# Altium PCB SHIELD_ENC28J60.PcbDoc
Units mil, origin at the board's own origin, x right, y up, seen from the top; angles counter-clockwise.
Board outline 2677.17 x 2086.61 mil, 2 copper layers (Top Layer, Bottom Layer); 66 components, 42 nets, 224 pads, 54 vias.
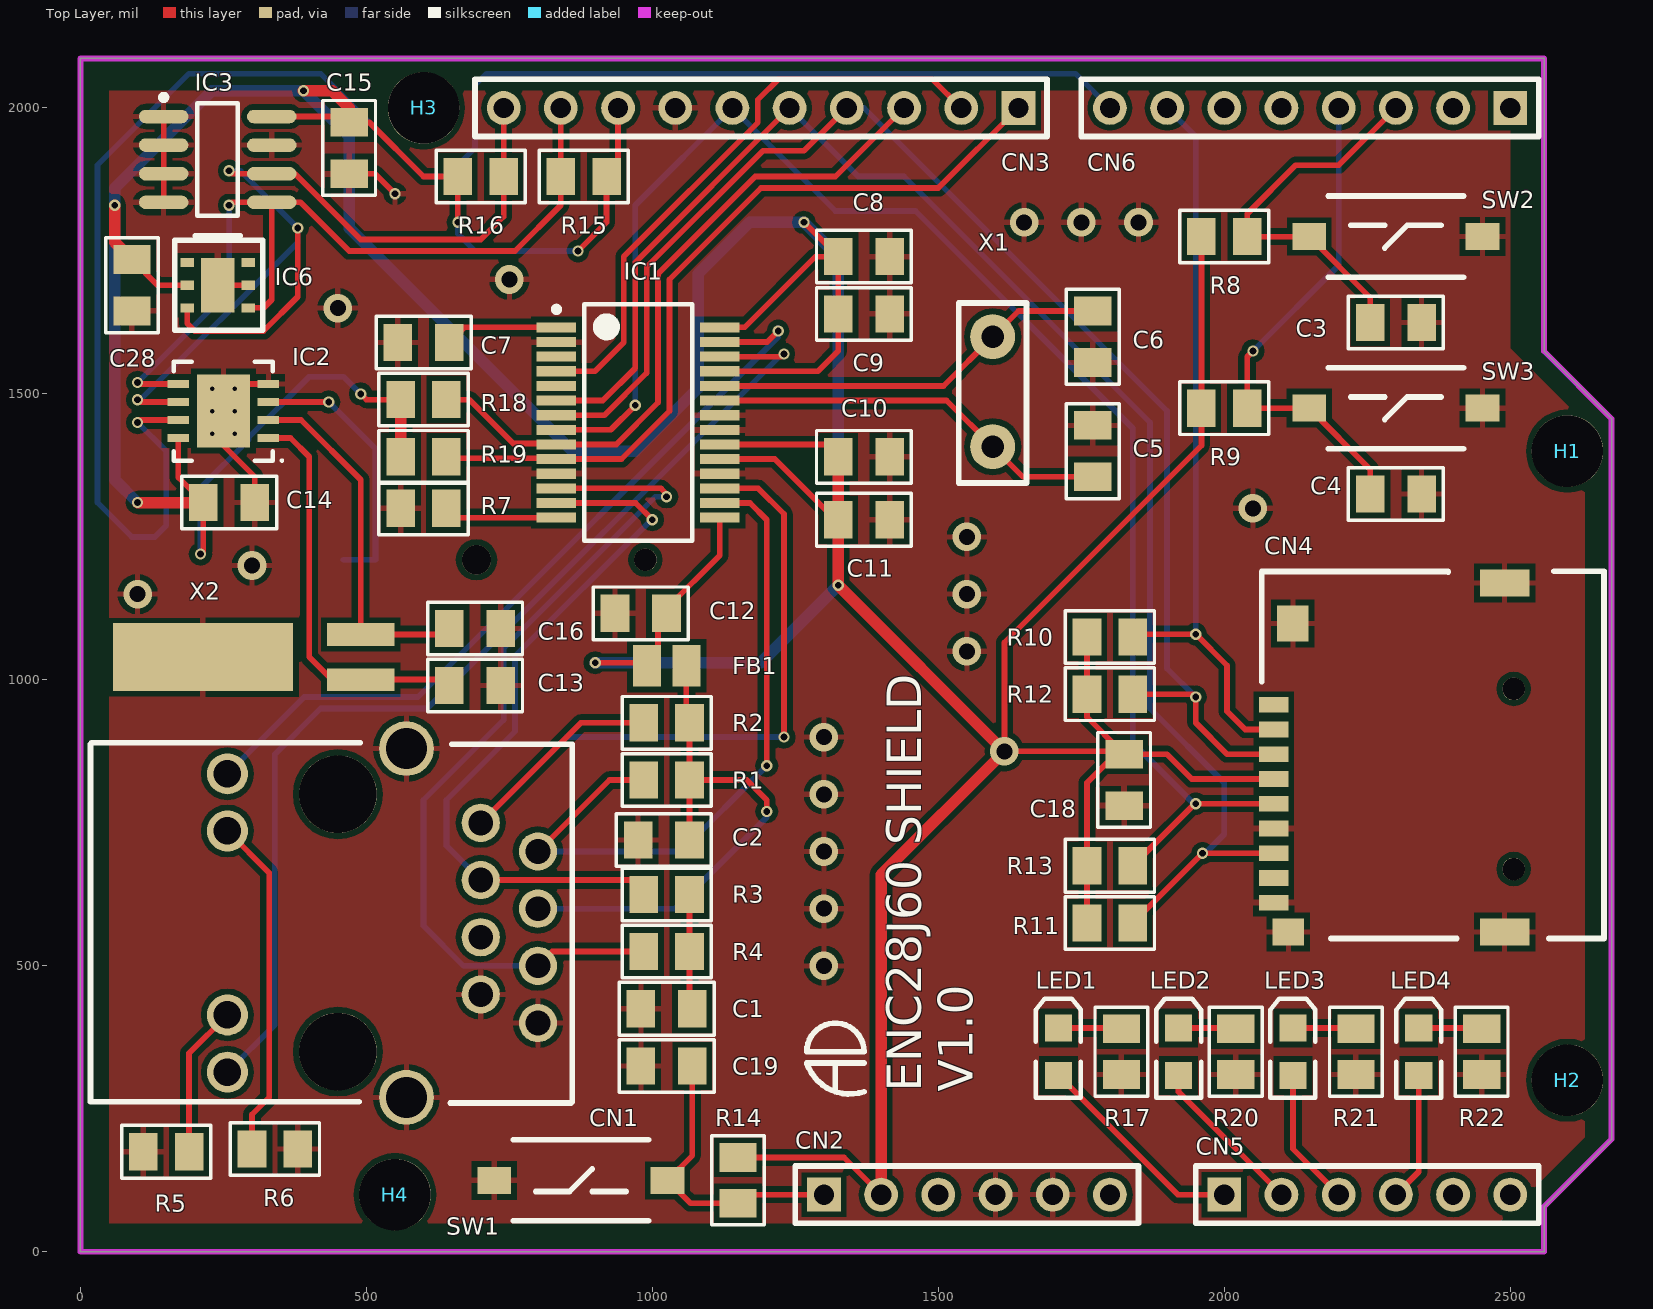
[diagram p0: Top Layer view]
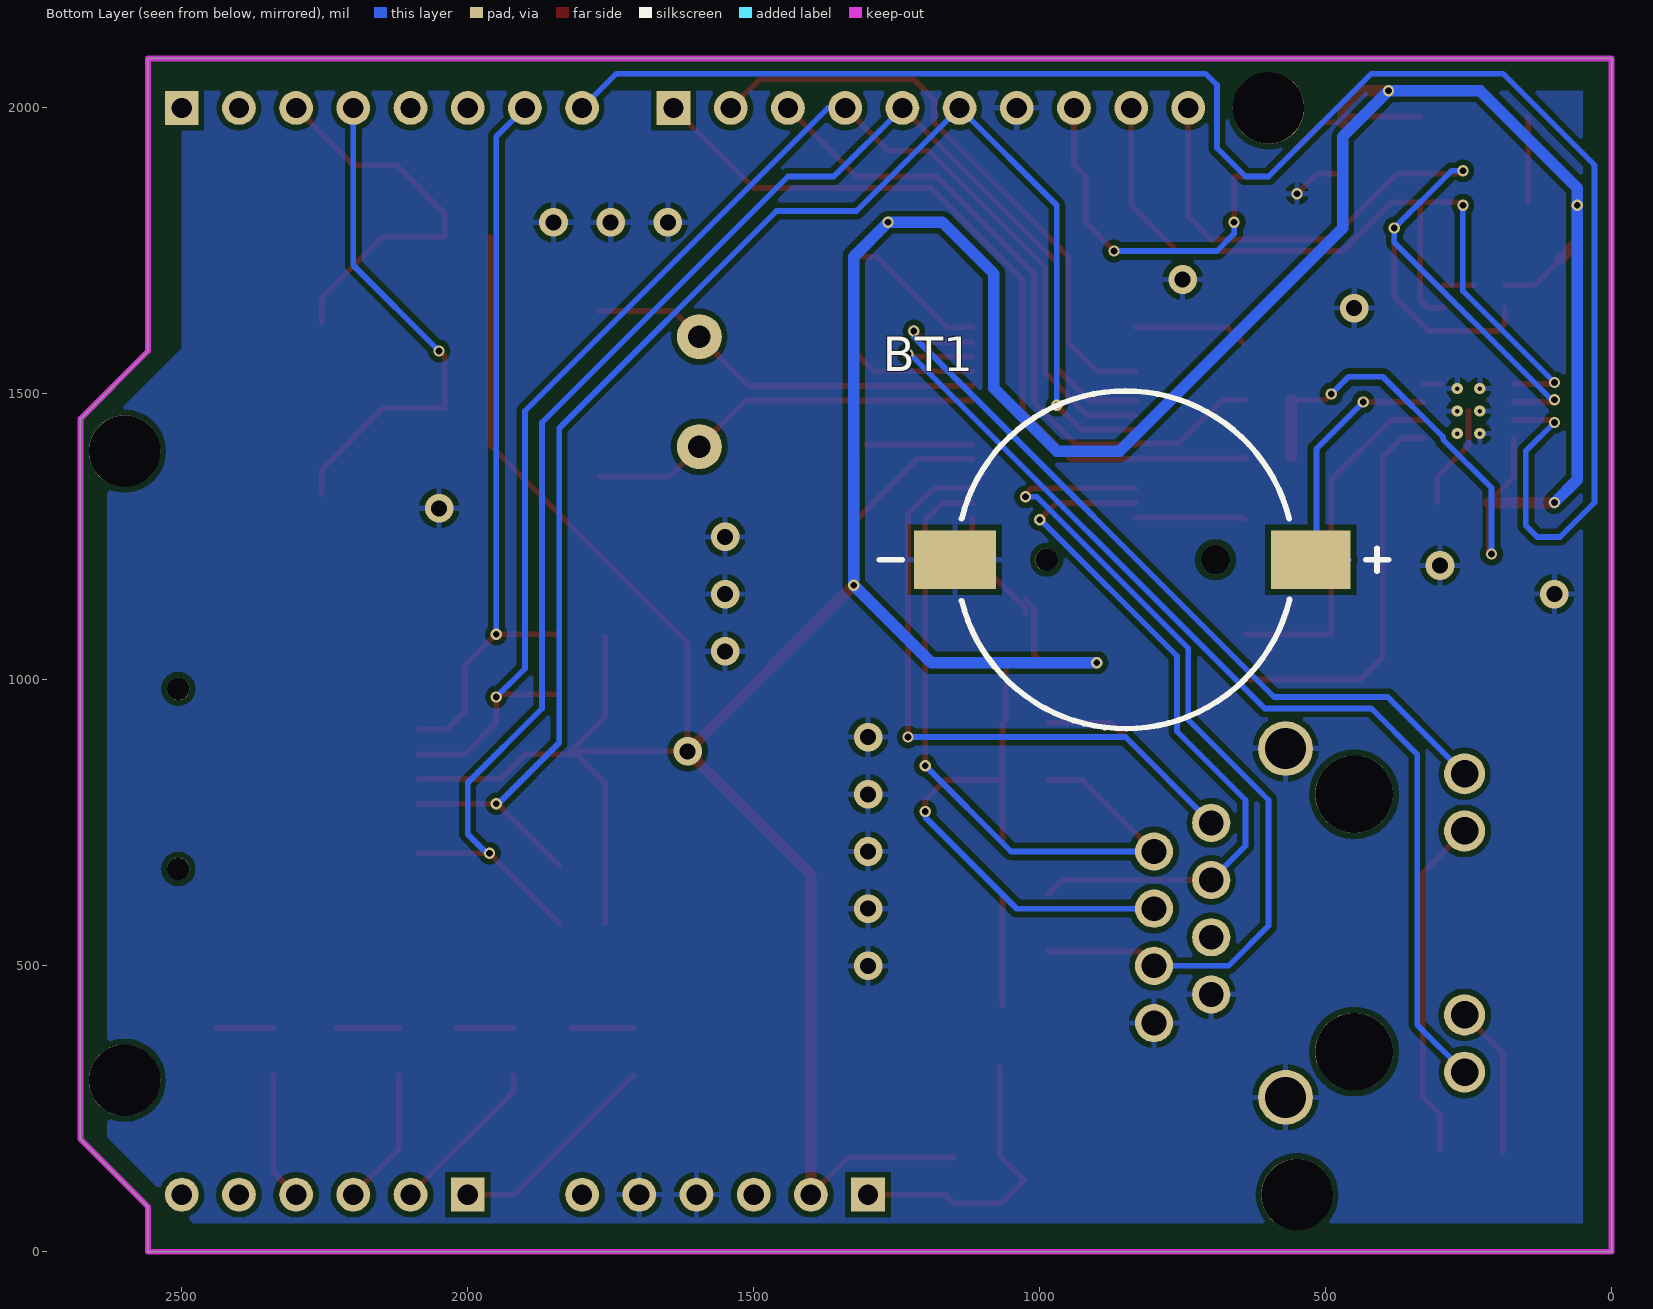
[diagram p1: Bottom Layer view, seen from below]

## Layer stack, top to bottom
Top Solder: solder mask 0.4, Solder Resist, Dk 3.5
Top Layer: signal copper 1.4
Dielectric 1: dielectric 12.6, FR-4, Dk 4.8
Bottom Layer: signal copper 1.4
Bottom Solder: solder mask 0.4, Solder Resist, Dk 3.5

## Board outline
0,0 0,2086.61 2559.06,2086.61 2559.06,1574.8 2677.17,1456.69 2677.17,196.85 2559.06,78.74 2559.06,0

## Design rules (kind name [scope] priority, off if disabled: settings)
Clearance [All] p1: gap=10
PolygonConnect [All] p1: connectstyle=Relief reliefconductorwidth=10 reliefentries=4 polygonreliefangle="90 Angle" airgapwidth=10
RoutingVias [All] p1: holewidth=11.81 width=19.68 viastyle="Through Hole" minholewidth=7.87 minwidth=15.75 maxholewidth=28 maxwidth=50
SolderMaskExpansion [All] p1: expansion=4
Width [All] p1: maxlimit=20 minlimit=10 preferedwidth=10
30 further rules are at their usual default settings.

## Components (designator, comment, footprint, x,y, rotation, side; value= is the part's Value field where it differs from the comment)
BT1 "BATTERY" MPD_BC501SM 850,1210 r180 bottom
C1 "CAP_NP" CAPC2012X100N_EIA0805 1025,425 r0 top
C2 "CAP_NP" CAPC2012X100N_EIA0805 1020,720 r0 top
C3 "CAP_NP" CAPC2012X100N_EIA0805 2300,1625 r180 top
C4 "CAP_NP" CAPC2012X100N_EIA0805 2300,1325 r180 top
C5 "CAP_NP" CAPC2012X100N_EIA0805 1770,1400 r270 top
C6 "CAP_NP" CAPC2012X100N_EIA0805 1770,1600 r90 top
C7 "CAP_NP" CAPC2012X100N_EIA0805 600,1590 r0 top
C8 "CAP_NP" CAPC2012X100N_EIA0805 1370,1740 r180 top
C9 "CAP_NP" CAPC2012X100N_EIA0805 1370,1640 r180 top
C10 "CAP_NP" CAPC2012X100N_EIA0805 1370,1390 r180 top
C11 "CAP_NP" CAPC2012X100N_EIA0805 1370,1280 r180 top
C12 "CAP_NP" CAPC2012X100N_EIA0805 979.74,1116.37 r0 top
C13 "CAP_NP" CAPC2012X100N_EIA0805 690,990 r180 top
C14 "CAP_NP" CAPC2012X100N_EIA0805 260,1310 r180 top
C15 "CAP_NP" CAPC2012X100N_EIA0805 470,1930 r90 top
C16 "CAP_NP" CAPC2012X100N_EIA0805 690,1090 r180 top
C18 "CAP_NP" CAPC2012X100N_EIA0805 1825,825 r90 top
C19 "CAP_NP" CAPC2012X100N_EIA0805 1025,325 r0 top
C28 "CAP_NP" CAPC2012X100N_EIA0805 90,1690 r90 top
CN1 "HR911105A" [HANRUN]HR911105A 450,575 r90 top
CN2 "HDR_1X6" HDRFV6W70P254_1X6_1524X254X1118P 1300,100 r0 top locked
CN3 "HDR_1X10" HDRFV10W70P254_1X10_2540X254X1118P 1640,2000 r180 top locked (schematic designator CN?)
CN4 "MICRO-SD" MICRO-SD-SELF-EJECT 2086.61,826.77 r180 top
CN5 "HDR_1X6" HDRFV6W70P254_1X6_1524X254X1118P 2000,100 r0 top locked
CN6 "HDR_1X8" HDRFV8W70P254_1X8_2032X254X1118P 2500,2000 r180 top locked
FB1 "BEAD" FILC2012X100N_EIA0805 1025,1025 r0 top
H1 "HOLES" HOLE_125MIL#1 2795.28,177.17 r0 top
H2 "HOLES" HOLE_125MIL#2 2992.13,177.17 r0 top
H3 "HOLES" HOLE_125MIL#3 3188.98,177.17 r0 top
H4 "HOLES" HOLE_125MIL#4 3346.46,177.17 r0 top
IC1 "ENC28J60T-I/SS" SOP65P780X200-28N_[MICROCHIP]SSOP28 975,1450 r0 top
IC2 "PCF8523TK/1,118" SON80P400X100_HS-9N_[NXP]SOT909-1 250,1470 r180 top
IC3 "AT24C128" SOIC127P600X175-8N 240,1910 r0 top
IC6 "SHT21" SHT21 240,1690 r0 top
LED1 "LED" LEDC2012X70N_EIA0805_RED 1710,350 r270 top
LED2 "LED" LEDC2012X70N_EIA0805_RED 1920,350 r270 top
LED3 "LED" LEDC2012X70N_EIA0805_RED 2120,350 r270 top
LED4 "LED" LEDC2012X70N_EIA0805_RED 2340,350 r270 top
R1 "RES" RESC2013X65N_EIA0805 1025,825 r180 top
R2 "RES" RESC2013X65N_EIA0805 1025,925 r180 top
R3 "RES" RESC2013X65N_EIA0805 1025,625 r0 top
R4 "RES" RESC2013X65N_EIA0805 1025,525 r0 top
R5 "RES" RESC2013X65N_EIA0805 150,175 r180 top
R6 "RES" RESC2013X65N_EIA0805 340,180 r0 top
R7 "RES" RESC2013X65N_EIA0805 600,1300 r180 top
R8 "RES" RESC2013X65N_EIA0805 2000,1775 r0 top
R9 "RES" RESC2013X65N_EIA0805 2000,1475 r0 top
R10 "RES" RESC2013X65N_EIA0805 1800,1075 r0 top
R11 "RES" RESC2013X65N_EIA0805 1800,575 r0 top
R12 "RES" RESC2013X65N_EIA0805 1800,975 r0 top
R13 "RES" RESC2013X65N_EIA0805 1800,675 r0 top
R14 "RES" RESC2013X65N_EIA0805 1150,125 r270 top
R15 "RES" RESC2013X65N_EIA0805 880,1880 r180 top (schematic designator R9)
R16 "RES" RESC2013X65N_EIA0805 700,1880 r0 top (schematic designator R10)
R17 "RES" RESC2013X65N_EIA0805 1820,350 r270 top
R18 "RES" RESC2013X65N_EIA0805 600,1490 r0 top
R19 "RES" RESC2013X65N_EIA0805 600,1390 r0 top
R20 "RES" RESC2013X65N_EIA0805 2020,350 r90 top
R21 "RES" RESC2013X65N_EIA0805 2230,350 r90 top
R22 "RES" RESC2013X65N_EIA0805 2450,350 r90 top
SW1 "SWITCH_TACTILE_2PIN" C&K_RS-282G05A3-SM_RT 875,125 r0 top
SW2 "SWITCH_TACTILE_2PIN" C&K_RS-282G05A3-SM_RT 2300,1775 r180 top
SW3 "SWITCH_TACTILE_2PIN" C&K_RS-282G05A3-SM_RT 2300,1475 r180 top
X1 "CRYSTAL" HC-49/US 1595,1600 r270 top
X2 "CRYSTAL_32K" 32.768_DIP 490,1040 r90 top

## Footprints (in the part's own frame and the unit in brackets; to place one, negate y for a bottom-side part, rotate by r counter-clockwise, add the part's x,y. Pads: shape width x height; smd on the part's side, far side on the other; paste and mask are expansions set on the pad)
32.768_DIP [mm]
  rect 1x3 smd: 1(-1,0) 2(1,0)
  rect 3x8 smd: 3(0,7)
  body extent -1.5,-0.01 1.5,11.01, height 3
[HANRUN]HR911105A [mm]
  round 1.7 hole 1.1: 1(4.445,-6.35) 2(3.175,-8.89) 3(1.905,-6.35) 4(0.635,-8.89) 5(-0.635,-6.35) 6(-1.905,-8.89) 7(-3.175,-6.35) 8(-4.445,-8.89)
  round 1.82 hole 1.22: 9(6.625,4.9) 10(4.085,4.9) 11(-4.085,4.9) 12(-6.625,4.9)
  round 2.43 hole 1.83: 13(7.745,-3.05) 14(-7.745,-3.05)
  round 3.45 hole 3.45: ""(-5.715,0) ""(5.715,0)
  silkscreen extent -8,-10.41 8,10.99, body extent -7.94,-10.41 7.94,10.99, height 13.51
C&K_RS-282G05A3-SM_RT [mm]
  rect 1.5x1.2 smd: 1(-3.85,0) 2(3.85,0)
  silkscreen extent -3,-1.8 3,1.8, body extent -4,-1.75 4,1.75, height 5
CAPC2012X100N_EIA0805 [mil]
  rect 50x65 smd: 1(-45,0) 2(45,0)
  silkscreen extent -83,-46 83,46, body extent -39,-25 39,25, height 31
FILC2012X100N_EIA0805 [mm] "Chip Inductor, 2-Leads, Body 2.0x1.3mm, IPC Medium Density"
  rect 1.25x1.85 smd: 1(-0.875,0) 2(0.875,0)
  body extent -1,-0.62 1,0.63, height 0.85
HC-49/US [mm]
  round 2 hole 1: 1(0,0) 2(4.88,0)
  silkscreen extent -1.5,-1.5 6.5,1.5, body extent -2.99,-2.24 7.99,2.25, height 3.6
HDRFV6W70P254_1X6_1524X254X1118P [mm]
  rect 1.5x1.5 hole 0.9: 1(0,0)
  round 1.5 hole 0.9: 2(2.54,0) 3(5.08,0) 4(7.62,0) 5(10.16,0) 6(12.7,0)
  silkscreen extent -1.27,-1.27 13.97,1.27, body extent -1.27,-1.27 13.97,1.27, height 6.02
HDRFV8W70P254_1X8_2032X254X1118P [mm]
  rect 1.5x1.5 hole 0.9: 1(0,0)
  round 1.5 hole 0.9: 2(2.54,0) 3(5.08,0) 4(7.62,0) 5(10.16,0) 6(12.7,0) 7(15.24,0) 8(17.78,0)
  silkscreen extent -1.27,-1.27 19.05,1.27, body extent -1.27,-1.27 19.05,1.27, height 6.02
HDRFV10W70P254_1X10_2540X254X1118P [mm]
  rect 1.5x1.5 hole 0.9: 1(0,0)
  round 1.5 hole 0.9: 2(2.54,0) 3(5.08,0) 4(7.62,0) 5(10.16,0) 6(12.7,0) 7(15.24,0) 8(17.78,0) 9(20.32,0) 10(22.86,0)
  silkscreen extent -1.27,-1.27 24.13,1.27, body extent -1.27,-1.27 24.13,1.27, height 6.02
HOLE_125MIL#1 [mm]
  round 3.175 hole 3.175: ""(-4.96,31.06)
HOLE_125MIL#2 [mm]
  round 3.175 hole 3.175: ""(-9.96,3.12)
HOLE_125MIL#3 [mm]
  round 3.175 hole 3.175: ""(-65.76,46.3)
HOLE_125MIL#4 [mm]
  round 3.175 hole 3.175: ""(-71.03,-1.96)
LEDC2012X70N_EIA0805_RED [mm] "SM LED; 2 Flat Leads"
  rect 1.2x1.2 smd: 1(-1.05,0) 2(1.05,0)
  silkscreen extent -2.35,-1 2.05,1, body extent -1.01,-0.62 1.01,0.62, height 1.1
MICRO-SD-SELF-EJECT [mm]
  rect 1.3x0.7 smd: 1(0,-3.3) 2(0,-2.2) 3(0,-1.1) 4(0,0) 5(0,1.1) 6(0,2.2) 7(0,3.3) 8(0,4.4) 9(0,5.5)
  rect 2.2x1.2 smd: 10(-10.25,6.8) 10(-10.25,-8.7)
  rect 1.4x1.6 smd: 10(-0.85,-6.9)
  rect 1.4x1.2 smd: 10(-0.65,6.8)
  round 1 hole 1: ""(-10.65,-4) ""(-10.65,4)
  silkscreen extent -14.67,-9.22 0.53,7.09, body extent -14.67,-9.22 0.54,7.09, height 2.17
MPD_BC501SM [mm]
  rect 3.54x2.6 smd: 1(8.23,0)
  rect 3.66x2.6 smd: 2(-7.57,0)
  round 1 hole 1: ""(-3.5,0)
  round 1.3 hole 1.3: ""(4,0)
  silkscreen extent -10.92,-7.5 11.68,7.5, body extent -8.89,-7.37 9.91,7.38, height 4.26
RESC2013X65N_EIA0805 [mil]
  rect 50x65 smd: 1(-40,0) 2(40,0)
  silkscreen extent -78,-46 78,46, body extent -39,-25 39,25, height 31
SHT21 [mm]
  rect 0.6x0.4 smd: 1(1.35,-1) 2(1.35,0) 3(1.35,1) 4(-1.35,1) 5(-1.35,0) 6(-1.35,-1)
  rect 1.5x2.4 smd: 7(0,0)
  silkscreen extent -1.9,-2 2,2.2, body extent -1.51,-1.5 1.51,1.5, height 1.13
SOIC127P600X175-8N [mm] "SOIC, 8-Leads, Body 4,90x3,90mm, Pitch 1,27mm, IPC Medium Density"
  oval 2.2x0.6 smd: 1(-2.4,1.905) 2(-2.4,0.635) 3(-2.4,-0.635) 4(-2.4,-1.905) 5(2.4,-1.905) 6(2.4,-0.635) 7(2.4,0.635) 8(2.4,1.905)
  silkscreen extent -2.52,-2.5 0.9,2.88, body extent -3.03,-2.5 3.03,2.5, height 1.9
SON80P400X100_HS-9N_[NXP]SOT909-1 [mm] "SON, 8-Leads, Body 4.00x4.00mm, Pitch 0.80mm, Thermal Pad 3.10x2.18mm, IPC Medium Density"
  rect 0.95x0.35 smd: 1(-2,1.2) 2(-2,0.4) 3(-2,-0.4) 4(-2,-1.2) 5(2,-1.2) 6(2,-0.4) 7(2,0.4) 8(2,1.2)
  rect 2.35x3.25 smd paste-1.09: 9(0,0)
  silkscreen extent -2.65,-2.2 2.2,2.25, body extent -2.05,-2.05 2.05,2.05, height 1
SOP65P780X200-28N_[MICROCHIP]SSOP28 [mm] "SOP, 28-Leads, Body 10.20x5.30mm, Pitch 0.65mm, IPC Medium Density"
  rect 1.75x0.45 smd: 1(-3.625,4.225) 2(-3.625,3.575) 3(-3.625,2.925) 4(-3.625,2.275) 5(-3.625,1.625) 6(-3.625,0.975) 7(-3.625,0.325) 8(-3.625,-0.325) 9(-3.625,-0.975) 10(-3.625,-1.625) 11(-3.625,-2.275) 12(-3.625,-2.925) 13(-3.625,-3.575) 14(-3.625,-4.225) 15(3.625,-4.225) 16(3.625,-3.575) 17(3.625,-2.925) 18(3.625,-2.275) 19(3.625,-1.625) 20(3.625,-0.975) 21(3.625,-0.325) 22(3.625,0.325) 23(3.625,0.975) 24(3.625,1.625) 25(3.625,2.275) 26(3.625,2.925) 27(3.625,3.575) 28(3.625,4.225)
  silkscreen extent -3.75,-5.25 2.4,5.25, body extent -3.88,-5.16 3.88,5.17, height 2.01

## Part data
BT1: library part SBAT00011, "HOLDER COIN CELL FOR CR1220 SMD"
C1 C2: library part SCAP00300085, "CAP CER 10000PF 50V X7R 0805"
C3 C4 C8 C9 C10 C11 C12 C14 C15 C18 C19 C28: library part SCAP00300093, "CAP CER 0.1UF 25V X7R 0805"
C5 C6: library part SCAP00300040, "CAP CER 18PF 50V NP0 0805"
C7: library part SCAP00300106, "CAP CER 10UF 10V X5R 0805"
C13 C16: library part SCAP00300030, "CAP CER 8PF 50V NP0 0805"
CN1: library part SCON00127, "CONN MAGJACK 1PORT 100 BASE-T"
CN2 CN5: library part SCON00124, "CONN ARDUINO HEADER .0100\" 6POS"
CN3: library part SCON00126, "CONN ARDUINO HEADER .0100\" 10POS"
CN4: library part SCON00094, "CONN MICRO SD CARD PUSH-PUSH R/A"
CN6: library part SCON00125, "CONN ARDUINO HEADER .0100\" 8POS"
FB1: library part SFIL00005, "FERRITE CHIP POWER 120 OHM SMD"
H1 H2 H3 H4: library part SMSC00005, "Holes"
IC1: library part SIC00131, "IC ETHERNET CTLR SPI 28SSOP"
IC2: library part SIC00133, "IC RTC CLK/CALENDAR I2C 8-HVSON"
IC3: library part SMEM00014, "IC EEPROM 128KBIT 1MHZ 8SOIC"
IC6: library part SSEN00014, "HUMIDITY AND TEMPERATURE SENSOR"
LED1 LED2 LED3 LED4: library part SOPT00004, "LED SUPER RED CLR THIN 0805 SMD"
R1 R2 R3 R4: library part SRES03030081, "RES SMD 49.9 OHM 1% 1/8W 0805"
R5 R6 R17 R20 R21 R22: library part SRES03010062, "RES SMD 330 OHM 1% 1/8W 0805"
R7: library part SRES03010081, "RES SMD 2K OHM 1% 1/8W 0805"
R8 R9 R10 R11 R12 R13 R14 R15 R16 R19: library part SRES03010098, "RES SMD 10K OHM 1% 1/8W 0805"
R18: library part SRES03010122, "RES SMD 100K OHM 1% 1/8W 0805"
SW1 SW2 SW3: library part SSWI00022, "SWITCH TACTILE SPST-NO 0.05A 12V"
X1: library part SCRY00016, "CRYSTAL 25.0000MHZ 18PF T/H"
X2: library part SCRY00009, "CRYSTAL 32.768KHZ 6PF THRU"

## Via types
v1: diameter 19.68, hole 11.81, Top Layer to Bottom Layer, 31 vias
v2: diameter 50, hole 28, Top Layer to Bottom Layer, 17 vias
v3: diameter 19.68, hole 7.87, Top Layer to Bottom Layer, 6 vias

## Nets (pads, with @x,y where several pads share a name; then routed paths per layer and width w, separated by ;. In a path a pad name is that pad's centre, name@x,y a point inside that pad or via, vN(x,y) a via of type N, cw(c..) or ccw(c..) an arc to the next point about the centre after c; other vN are vias at no path point)
3V3: C8.2 C9.2 C10.2 C11.2 C12.2 C14.2 C15.2 C18.2 C28.2 CN2.2 CN3.8 CN4.4 FB1.1 IC1.15 IC1.19 IC1.20 IC1.25 IC1.28 IC2.8 IC3.8 IC6.5 R8.1 R9.1 R10.1 R11.1 R12.1 R13.1 R14.1 R15.1 R16.1 R18.1 R19.1 | length 11376
  Top Layer w10: C28.2 135,1690 IC6.5 ; IC2.8 171.26,1353.74 C14.2 215,1225 v1(210,1220) ; IC3.8 C15.2@460,1985 ; C15.2 505,1975 600,1880 R16.1 v1(660,1800) ; v1(490,1500) 500,1490 R18.1 ; v1(870,1750) 920,1800 R15.1 940,1900 CN3.8 ; v1(900,1030) 985.55,1030 FB1.1 1010,1044.45 1010,1125 C12.2@1025,1140 ; C12.2@1025,1116.37 1025,1125 1117.72,1217.72 IC1.15 ; IC1.19 1213.98,1386.02 1320,1280 C11.2 ; IC1.20 C10.2@1303.39,1411.61 ; IC1.25 1289.57,1539.57 1325,1575 C9.2 C8.2 ; IC1.28 1161.34,1616.34 1285,1740 C8.2 ; R14.1 1335,165 CN2.2 ; v1(1265,1800) C8.2 ; R11.1 R13.1 1760,820 1810,870 C18.2 ; R10.1 R12.1 1760,935 C18.2@1820,875 ; R8.1 R9.1 1960,1410 1615.55,1065.55 v2(1615.55,875) C18.2@1820,875 ; CN4.4 1943.23,826.77 1900,870 C18.2 ; C18.2@1820,875 C18.2
  Top Layer w20: v1(60,1830) 60,1765 C28.2 ; v1(100,1310) C14.2 ; v1(390,2030) 440,2030 470,2000 C15.2 ; R19.1 R18.1 ; v1(1325,1165.55) v2(1615.55,875) 1400,659.45 CN2.2 ; v1@1325,1170 C11.2 C10.2
  Bottom Layer w10: v1(210,1220) 210,1335.81 294.53,1420.34 294.53,1424.53 400,1530 460,1530 v1(490,1500) ; v1(660,1800) 660,1780 690,1750 v1(870,1750)
  Bottom Layer w20: v1(100,1310) 60,1350 v1(60,1830) 60,1860 230,2030 v1(390,2030) 470,1950 470,1790 860,1400 970,1400 1080,1510 1080,1710 1170,1800 v1(1265,1800) 1325,1740 v1(1325,1165.55) 1189.45,1030 v1(900,1030)
5V: CN2.3
ETH_CS: CN3.3 IC1.9 R18.2 | length 1208.1
  Top Layer w10: R18.2 680,1490 756.65,1413.35 830.55,1413.35 IC1.9 936.75,1411.61 1010,1484.87 1010,1710 1180,1880 1320,1880 CN3.3
ETH_INT: CN3.2 IC1.4 | length 1075.3
  Top Layer w10: IC1.4 899.57,1539.57 950,1590 950,1740 1184.53,1974.53 1184.53,2014.53 1220,2050 1490,2050 CN3.2
  Bottom Layer w10: CN3.2@1530,2000 CN3.2 CN3.2@1550,1990
ETH_RESET: CN3.1 IC1.10 R19.2 | length 1389.6
  Top Layer w10: R19.2 640,1387.76 IC1.10@830.55,1387.76 ; IC1.10 946.02,1386.02 1030,1470 1030,1700 1190,1860 1500,1860 CN3.1
GND: BT1.2 C1.1 C2.1 C3.1 C4.1 C5.1 C6.1 C7.1 C8.1 C9.1 C10.1 C11.1 C12.1 C13.1 C14.1 C15.1 C16.1 C18.1 C19.1 C28.1 CN1.7 CN1.8 CN1.13 CN1.14 CN2.4 CN2.5 CN3.7 CN4.6 CN4.9 CN4.10 IC1.2 IC1.11 IC1.18 IC1.21 IC1.22 IC2.4 IC2.9 IC3.1 IC3.2 IC3.3 IC3.4 IC3.7 IC6.2 IC6.7 R5.2 R6.2 R7.2 R17.2 R20.1 R21.1 R22.1 SW1.1 SW2.1 SW3.1 X2.3 | length 511.9
  Top Layer w10: IC3.4 IC3.1 ; IC6.7 IC6.2 ; IC2.9 250,1410 305,1355 C14.1 ; 297.24,1517.24 IC2.4 ; C15.1 515,1885 v1(550,1850)
  other v2: 1300,500 1300,600 1300,700 1300,800 1300,900 1550,1050 100,1150 1550,1150 300,1200 1550,1250 2050,1300 450,1650 750,1700 1650,1800 1750,1800 1850,1800
  other v3: 230.31,1430.63 269.68,1430.63 230.31,1470 269.68,1470 230.31,1509.37 269.68,1509.37
I2C_SCL: CN3.10 IC2.6 IC3.6 IC6.6 R16.2 | length 1760.6
  Top Layer w10: v1(100,1490) 104.25,1485.75 IC2.6 ; IC6.6 186.85,1623.15 200,1610 320,1610 380,1670 v1(380,1790) ; v1(260,1890) 265,1885 IC3.6 375,1885 490,1770 700,1770 740,1810 R16.2 CN3.10
  Bottom Layer w10: v1(100,1490) 105.13,1490 380,1764.87 v1(380,1790) 280,1890 v1(260,1890)
I2C_SDA: CN3.9 IC2.5 IC3.5 IC6.1 R15.2 | length 1496.7
  Top Layer w10: v1(100,1520) 102.76,1517.24 IC2.5 ; v1(260,1830) 265,1835 IC3.5 ; IC6.1 320.63,1650.63 334.49,1664.49 IC3.5 ; CN3.9 R15.2 840,1830 760,1750 470,1750 385,1835 IC3.5
  Bottom Layer w10: v1(100,1520) 260,1680 v1(260,1830) ; CN3.9 CN3.9@850,2000
LED1: CN5.1 LED1.2 | length 376.4
  Top Layer w10: LED1.2 1918.66,100 CN5.1
LED2: CN5.2 LED2.2 | length 283.2
  Top Layer w10: LED2.2 1919.99,280.01 CN5.2
LED3: CN5.3 LED3.2 | length 241.8
  Top Layer w10: LED3.2 2119.99,180.01 CN5.3
LED4: CN5.4 LED4.2 | length 225.2
  Top Layer w10: CN5.4 2339.99,139.99 LED4.2
MAGJACK_LEDA: CN1.9 IC1.27 | length 1404.8
  Top Layer w10: IC1.27 1200.75,1590.75 v1(1220,1610)
  Bottom Layer w10: CN1.9 391.26,970 590,970 1220,1600 v1@1220,1615.13
MAGJACK_LEDB: CN1.12 IC1.26 | length 1884.4
  Top Layer w10: IC1.26 1225.16,1565.16 v1(1230,1570)
  Bottom Layer w10: CN1.12 340,397.09 340,870 420,950 606.58,950 1226.58,1570 v1(1230,1570)
MICROSD_CS: CN4.2 CN6.7 R10.2 | length 1305.3
  Top Layer w10: R10.2 1845,1080 v1(1950,1080) 2004.71,1025.29 2004.71,945.29 2036.61,913.39 CN4.2
  Bottom Layer w10: CN6.7 1950,1950 v1(1950,1080)
NetBT1_1: BT1.1 IC2.3 | length 471.1
  Top Layer w10: IC2.3 v1(434.25,1485.75)
  Bottom Layer w10: v1(434.25,1485.75) 515.98,1404.02 515.98,1210 BT1.1@460,1210
NetC1_2: C1.2 R3.2 R4.2 | length 195
  Top Layer w10: C1.2@1065,430 R4.2 R3.2
NetC2_2: C2.2 CN1.4 FB1.2 R1.1 R2.1 | length 945.2
  Top Layer w10: R2.1@1059.45,930.55 FB1.2 ; C2.2 R1.1 ; R2.1 R1.1 ; v1(1200,770) 1200,790 1165,825 R1.1
  Bottom Layer w10: CN1.4 1040,600 1200,760 v1(1200,770)
NetC5_2: C5.2 IC1.23 X1.2 | length 707.5
  Top Layer w10: IC1.23 1514.49,1488.39 X1.2 1647.87,1355 C5.2
NetC6_2: C6.2 IC1.24 X1.1 | length 706.6
  Top Layer w10: IC1.24 1508.98,1513.98 X1.1 1640,1645 C6.2
NetC7_2: C7.2 IC1.1 | length 198.2
  Top Layer w10: C7.2 671.34,1616.34 IC1.1
NetC13_2: C13.2 IC2.1 X2.1 | length 685.5
  Top Layer w10: IC2.1 367.24,1422.76 400,1390 400,1040 439.37,1000.63 X2.1 C13.2@634.37,1000.63
NetC16_2: C16.2 IC2.2 X2.2 | length 625.1
  Top Layer w10: IC2.2 385.75,1454.25 490,1350 X2.2 C16.2@640,1079.37
NetCN1_10: CN1.10 R6.1 | length 598.5
  Top Layer w10: CN1.10 330,662.91 330,270 300,240 R6.1
NetCN1_11: CN1.11 R5.1 | length 267
  Top Layer w10: R5.1 190,347.09 CN1.11
NetIC1_14: IC1.14 R7.1 | length 193.8
  Top Layer w10: R7.1@640,1280 643.66,1283.66 IC1.14
NetLED1_1: LED1.1 R17.1 | length 108.7
  Top Layer w10: LED1.1 R17.1@1818.65,391.35
NetLED2_1: LED2.1 R20.2 | length 98.7
  Top Layer w10: LED2.1 R20.2@2018.65,391.35
NetLED3_1: LED3.1 R21.2 | length 108.7
  Top Layer w10: LED3.1 R21.2@2228.65,391.35
NetLED4_1: LED4.1 R22.2 | length 98.7
  Top Layer w10: LED4.1 R22.2@2438.65,391.35
R\E\S\E\T\: C19.2 CN2.1 R14.2 SW1.2 | length 514.2
  Top Layer w10: C19.2 1070,168.43 SW1.2 1066.57,85 R14.2 1165,100 CN2.1
RTC_INT: CN6.8 IC2.7 | length 3091.5
  Top Layer w10: v1(100,1450) 104.25,1454.25 IC2.7
  Bottom Layer w10: v1(100,1450) 150,1400 150,1270 130,1250 90,1250 30,1310 30,1900 190,2060 420,2060 600,1880 640,1880 690,1930 690,2040 710,2060 1740,2060 CN6.8
SPI_MISO: CN3.5 CN4.7 IC1.6 R11.2 | length 2702.5
  Top Layer w10: IC1.6 913.39,1488.39 970,1545 970,1730 CN3.5 ; R11.2 v1@1957.5,692.5 ; v1(1961.85,696.85) CN4.7
  Bottom Layer w10: CN3.5 1360,1880 1440,1880 1870,1450 1870,950 2000,820 2000,730 1966.85,696.85 v1(1961.85,696.85)
SPI_MOSI: CN3.4 CN4.3 IC1.7 R12.2 | length 2455.3
  Top Layer w10: IC1.7 916.08,1462.8 990,1536.72 990,1721.72 1193.28,1925 1265,1925 CN3.4 ; R12.2 1945,975 v1(1950,970) 1950,925 2004.92,870.08 CN4.3
  Bottom Layer w10: CN3.4 1370,2000 1900,1470 1900,1020 v1(1950,970)
SPI_SCK: CN3.6 CN4.5 IC1.8 R13.2 | length 2670.6
  Top Layer w10: IC1.8 927.2,1437.2 v1(970,1480) ; R13.2 v1@1947.5,782.5 ; v1(1950,783.46) CN4.5
  Bottom Layer w10: v1(970,1480) 970,1830 CN3.6 1320,1820 1460,1820 1840,1440 1840,890 1946.54,783.46 v1(1950,783.46)
TPIN+: CN1.3 IC1.13 R3.1 | length 1281.2
  Top Layer w10: CN1.3 960,650 R3.1 ; IC1.13@833.03,1310 IC1.13 970.75,1309.25 v1(1000,1280)
  Bottom Layer w10: CN1.3 640,710 640,790 760,910 760,1041.72 998.28,1280 v1(1000,1280)
TPIN-: CN1.6 IC1.12 R4.1 | length 1563.8
  Top Layer w10: CN1.6 825,525 R4.1 ; IC1.12 1015.16,1334.84 1024.87,1325.13 v1(1024.87,1320)
  Bottom Layer w10: CN1.6 670,500 600,570 600,790 740,930 740,1055.13 1004.87,1320 v1(1024.87,1320)
TPOUT+: CN1.1 IC1.17 R2.2 | length 1470.5
  Top Layer w10: CN1.1 875,925 R2.2 ; IC1.17 1185.16,1334.84 1230,1290 v1(1230,900)
  Bottom Layer w10: CN1.1 850,900 v1(1230,900)
TPOUT-: CN1.2 IC1.16 R1.2 | length 1223.3
  Top Layer w10: CN1.2 925,825 R1.2 ; IC1.16 1170.75,1309.25 1200,1280 v1(1200,850)
  Bottom Layer w10: CN1.2 1050,700 v1(1200,850)
USER_BUTTON_1: C3.2 CN6.3 R8.2 SW2.2 | length 679.2
  Top Layer w10: C3.2 2255,1668.43 SW2.2 R8.2 2040,1815 2125,1900 2200,1900 CN6.3
USER_BUTTON_2: C4.2 CN6.4 R9.2 SW3.2 | length 893.8
  Top Layer w10: v1(2050,1575) 2040,1565 R9.2 SW3.2 2255,1368.43 C4.2
  Bottom Layer w10: v1(2050,1575) 2200,1725 CN6.4
VIN: CN2.6
pads on no net: BT1. CN1. CN1.5 CN4. CN4.1 CN4.8 CN5.5 CN5.6 CN6.1 CN6.2 CN6.5 CN6.6 H1. H2. H3. H4. IC1.3 IC1.5 IC6.3 IC6.4

## Polygon pours and split planes (outlines as drawn)
GND on Top Layer "Top Layer-No Net 1" (solid, pour order 8): 50,50 2480,50 2630,200 2630,1450 2500,1580 2500,2030 50,2030 50,50
GND on Bottom Layer "Top Layer-No Net 1" (solid, pour order 10): 50,50 2480,50 2630,200 2630,1450 2500,1580 2500,2030 50,2030 50,50

## Keep-outs
Keep-Out Layer:
  lines w10: 0,0 2559.06,0 2559.06,78.74 2677.17,196.85 2677.17,1456.69 2559.06,1574.8 2559.06,2086.61 0,2086.61 0,1909.45 0,0

## Silkscreen, mask and mechanical layers (free items; w line width, h text height)
Top Overlay:
  lines w10: 1320,280 1320,330 ; 1370,280 cw(c1345,355) 1270,330 1370,330 ; 1270,350 cw(c1320,350) 1370,350 1270,350
  text "ENC28J60 SHIELD" at 1470,280 h60 r90
  text "V1.0" at 1560,280 h60 r90

## Dimensions
0,2086.61 to 1640,2000 on Mechanical 16
0,2086.61 to 2500,2000 on Mechanical 16
2559.06,0 to 2559.06,2086.61 on Mechanical 16
2559.06,1574.8 to 2559.06,0 on Mechanical 16
2677.17,1456.69 to 2559.06,0 on Mechanical 16
2677.17,196.85 to 2559.06,0 on Mechanical 16
2559.06,0 to 2559.06,78.74 on Mechanical 16
0,0 to 2559.06,78.74 on Mechanical 16
0,0 to 2677.17,196.85 on Mechanical 16
0,2086.61 to 0,0 on Mechanical 16